# Altium PCB stc15.PcbDoc
Units mil, origin at the board's own origin, x right, y up, seen from the top; angles counter-clockwise.
Board outline 820 x 900 mil, 2 copper layers (Top Layer, Bottom Layer); 10 components, 12 nets, 53 pads, 6 vias.
Unrouted connection lines stored in the file: 1.
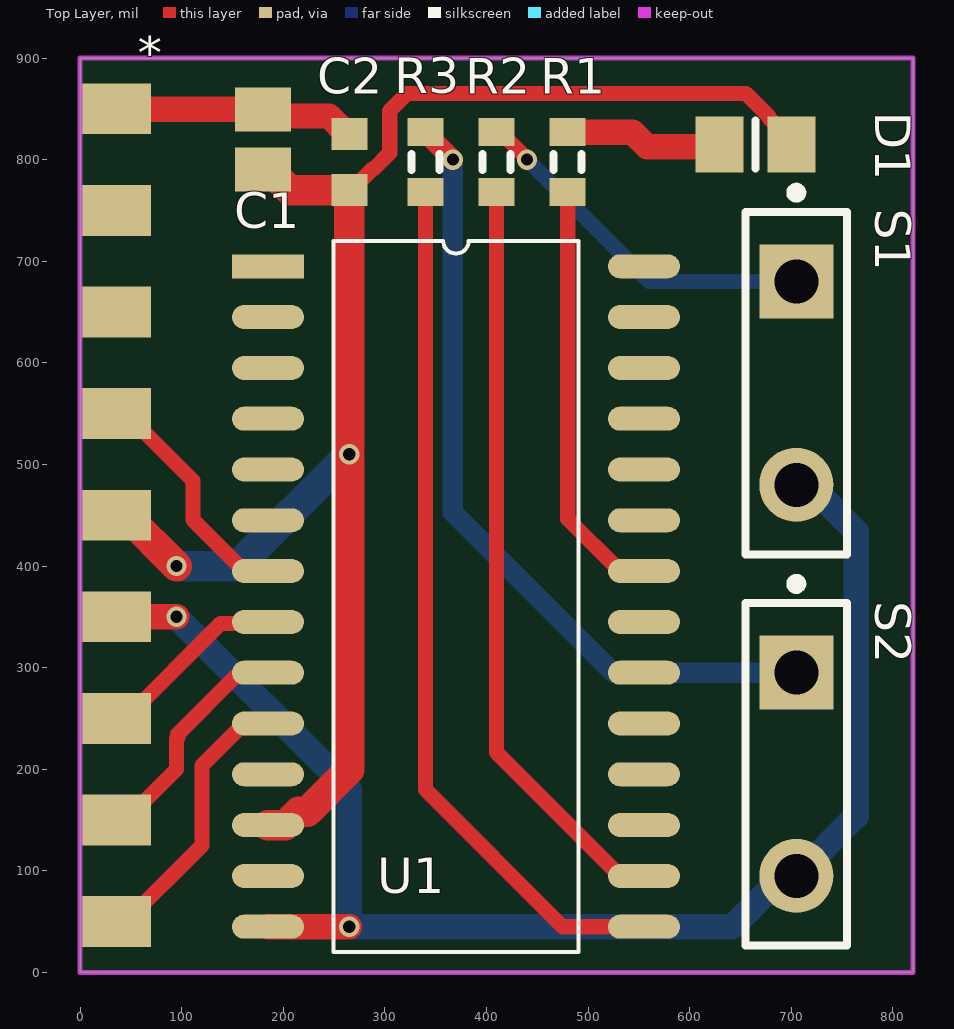
[diagram p0: Top Layer view]
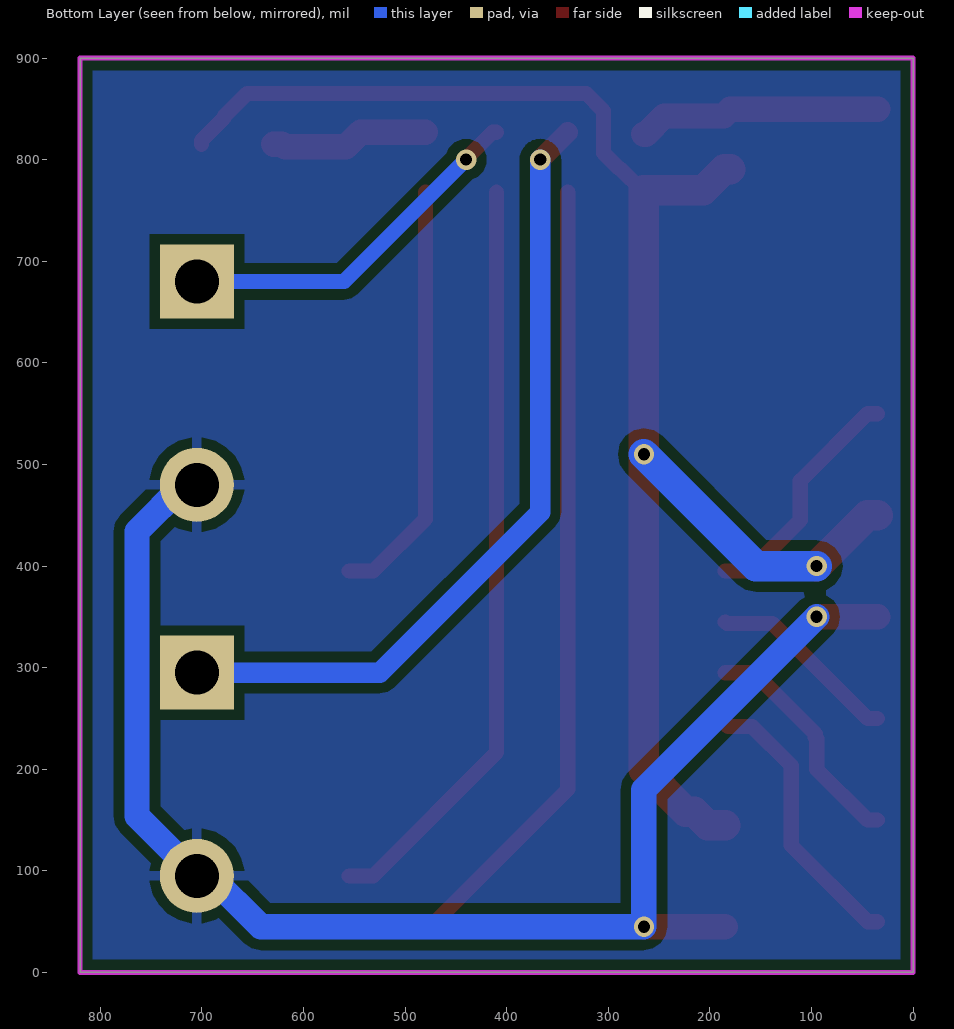
[diagram p1: Bottom Layer view, seen from below]

## Layer stack, top to bottom
Top Solder: solder mask 0.4, Solder Resist, Dk 3.5
Top Layer: signal copper 1.4
Dielectric 1: dielectric 12.6, FR-4, Dk 4.8
Bottom Layer: signal copper 1.4
Bottom Solder: solder mask 0.4, Solder Resist, Dk 3.5

## Board outline
0,0 0,900 820,900 820,0

## Design rules (kind name [scope] priority, off if disabled: settings)
Clearance "Stitching GND" [IsStitchingVia and InNet('GND') vs (IsVia and (Not IsStitchingVia)) Or IsPad] p1: gap=5 ignorepadtopadclearanceinfootprint=FALSE
Clearance [All] p2: gap=10 ignorepadtopadclearanceinfootprint=FALSE except(0: Arc-Hole Track-Hole SMDPad-Hole THPad-Hole Via-Hole Fill-Hole Poly-Hole Region-Hole Text-Hole)
PolygonConnect [All] p1: connectstyle=Relief reliefconductorwidth=10 reliefentries=4 polygonreliefangle="90 Angle" airgapwidth=10
RoutingVias [All] p1: holewidth=20 width=25 viastyle="Through Hole" minholewidth=10 minwidth=5 maxholewidth=25 maxwidth=30
SolderMaskExpansion [All] p1: expansion=4 istentingtop=FALSE
Width [All] p1: maxlimit=30 minlimit=15 preferedwidth=25 minimp=50.000000 maximp=50.000000 favimp=50.000000
Width Width_GND [InNet('GND')] p2: maxlimit=30 minlimit=20 preferedwidth=30 minimp=50.000000 maximp=50.000000 favimp=50.000000
30 further rules are at their usual default settings.

## Components (designator, comment, footprint, x,y, rotation, side; value= is the part's Value field where it differs from the comment)
* "9pads" 9pads 35,50 r180 top
C1 "Cap Pol3" C0805 180,820 r90 top value=100pF
C2 "Cap Semi" 1608[0603] 265,797.44 r270 top value=100pF
D1 "LED2" 6-0805_N 665,815 r180 top
R1 "Res3" J1-0603 480,797.44 r90 top value=1K
R2 "Res3" J1-0603 410,797.44 r90 top value=1K
R3 "Res3" J1-0603 340,797.44 r90 top value=1K
S1 "SW-PB" SPST-2 705,580 r270 top
S2 "SW-PB" SPST-2 705,195 r270 top
U1 "STC15W401AS_SOP28_TSSOP28_SKDIP28" SOP28 184.92,695 r0 top

## Footprints (in the part's own frame and the unit in brackets; to place one, negate y for a bottom-side part, rotate by r counter-clockwise, add the part's x,y. Pads: shape width x height; smd on the part's side, far side on the other; paste and mask are expansions set on the pad)
6-0805_N [mm] "Chip Resistor, Body 2.0x1.2mm, IPC Medium Density"
  rect 1.2x1.4 smd: 1(-0.9,0) 2(0.9,0)
  silkscreen extent 0,-0.6 0,0.6, body extent -1.07,-0.7 1.07,0.7, height 0.7
9pads [mil]
  rect 70x50 smd: 1(0,0) 2(0,-100) 3(0,-200) 4(0,-300) 5(0,-400) 6(0,-500) 7(0,-600) 8(0,-700) 9(0,-800)
1608[0603] [mm] "Chip Capacitor, Body 1.6x0.8mm, IPC High Density"
  rect 0.8x0.9 smd: 1(-0.7,0) 2(0.7,0)
  body extent -0.87,-0.48 0.87,0.48, height 1.3
C0805 [mm] "Chip Capacitor, Body 2.0x1.3mm, IPC High Density"
  rect 1.1x1.4 smd: 1(-0.75,0) 2(0.75,0)
  body extent -1.1,-0.72 1.1,0.72, height 1.4
J1-0603 [mm] "Chip Resistor, Body 1.6x0.8mm, IPC High Density"
  rect 0.7x0.9 smd: 1(-0.75,0) 2(0.75,0)
  silkscreen extent -0.2,-0.35 0.2,0.35, body extent -0.85,-0.48 0.85,0.48, height 0.9
SOP28 [mm]
  rect 1.8x0.6 smd: 1(0,0)
  oval 1.8x0.6 smd: 2(0,-1.27) 3(0,-2.54) 4(0,-3.81) 5(0,-5.08) 6(0,-6.35) 7(0,-7.62) 8(0,-8.89) 9(0,-10.16) 10(0,-11.43) 11(0,-12.7) 12(0,-13.97) 13(0,-15.24) 14(0,-16.51) 15(9.4,-16.51) 16(9.4,-15.24) 17(9.4,-13.97) 18(9.4,-12.7) 19(9.4,-11.43) 20(9.4,-10.16) 21(9.4,-8.89) 22(9.4,-7.62) 23(9.4,-6.35) 24(9.4,-5.08) 25(9.4,-3.81) 26(9.4,-2.54) 27(9.4,-1.27) 28(9.4,0)
  silkscreen extent 1.64,-17.14 7.77,0.64
SPST-2 [mm] "Switch; 2 Leads"
  rect 1.85x1.85 hole 1.1: 1(-2.54,0)
  round 1.85 hole 1.1: 2(2.54,0)
  silkscreen extent -4.89,-1.27 4.28,1.27

## Part data
C1: "Polarized Capacitor (Surface Mount)", LatestRevisionDate=29-May-2009, LatestRevisionNote="IPC-7351 Footprint Added.", PackageDescription="Chip Capacitor", PackageReference=C0805, Published=8-Jun-2000, Publisher="Altium Limited"
C2: "Capacitor (Semiconductor SIM Model)", LatestRevisionDate=29-May-2009, LatestRevisionNote="IPC-7351 Footprint Added.", PackageDescription="Chip Capacitor", PackageReference=C1206, Published=8-Jun-2000, Publisher="Altium Limited"
D1: "Typical RED, GREEN, YELLOW, AMBER GaAs LED", LatestRevisionDate=17-Jul-2002, LatestRevisionNote="Re-released for DXP Platform.", PackageDescription="SM LED; 2 Flat Leads", PackageReference=3.2X1.6X1.1, PackageVersion=Feb-2002, Published=8-Jun-2000, Publisher="Altium Limited"
R1 R2 R3: "Resistor", LatestRevisionDate=29-May-2009, LatestRevisionNote="IPC-7351 Footprint Added.", PackageDescription="Chip Resistor", PackageReference=J1-0603, Published=8-Jun-2000, Publisher="Altium Limited"
S1 S2: "Switch", LatestRevisionDate=17-Jul-2002, LatestRevisionNote="Re-released for DXP Platform.", PackageDescription="Switch; 2 Leads", PackageReference=SPST-2, Published=24-Mar-1999, Publisher="Altium Limited"

## Via types
v1: diameter 20, hole 12, Top Layer to Bottom Layer, 6 vias

## Nets (pads, with @x,y where several pads share a name; then routed paths per layer and width w, separated by ;. In a path a pad name is that pad's centre, name@x,y a point inside that pad or via, vN(x,y) a via of type N, cw(c..) or ccw(c..) an arc to the next point about the centre after c; other vN are vias at no path point)
CH1: *.1 U1.10 | length 276.8
  Top Layer w15: *.1 45,50 120,125 120,203.7 158.48,242.18 182.11,242.18 U1.10
CH2: *.2 U1.9 | length 229.6
  Top Layer w15: *.2 45,150 95,200 95,230 96.25,231.25 96.25,234.7 152.24,290.69 154.66,290.69 158.97,295 U1.9
CH3: *.3 U1.8 | length 189.3
  Top Layer w15: *.3 45,250 138.35,343.35 183.27,343.35 U1.8
GND: *.4 *.9 C1.2 C2.1 S1.2 S2.2 U1.14 | length 1657.9
  Top Layer w25: *.4 v1(95,350) ; *.9@35,849.76 179.76,849.76 C1.2 186.56,842.97 245.06,842.97 263.03,825 C2.1 ; U1.14 v1(265,45)
  Bottom Layer w25: v1(95,350) 265,180 v1(265,45) 642.06,45 692.06,95 S2.2 763.92,153.92 763.92,434.03 717.94,480 S1.2
NetD1_2: D1.2 R1.2 | length 156.6
  Top Layer w25: R1.2 543.96,826.97 558.42,812.5 618.44,812.5 620.94,815 D1.2
NetR1_1: R1.1 U1.22 | length 417.8
  Top Layer w15: R1.1 480,446.38 531.38,395 U1.22
NetR2_1: R2.1 U1.16 | length 746.8
  Top Layer w15: R2.1 410,216.38 531.38,95 U1.16
NetR2_2: R2.2 S1.1 | length 356.4
  Top Layer w15: R2.2 413.94,826.97 440,800.91 v1(440,800)
  Bottom Layer w15: v1(440,800) 560,680 S1.1
NetR3_1: R3.1 U1.15 | length 858.8
  Top Layer w15: R3.1 340,180 475,45 U1.15
NetR3_2: R3.2 S2.1 | length 788.6
  Top Layer w20: R3.2 v1(366.97,800)
  Bottom Layer w20: v1(366.97,800) 366.97,453.03 525,295 S2.1
RSSI: *.6 U1.7 | length 236.8
  Top Layer w15: *.6 45,550 111.08,483.92 111.08,445.22 161.3,395 U1.7
VCC: *.5 C1.1 C2.2 D1.1 U1.12 | length 1585.7
  Top Layer w15: C2.2 266.97,769.88 288.48,791.4 289.61,791.4 304.78,806.57 304.78,848 321.79,865 655.5,865 678.19,842.31 678.19,841.18 700.43,818.94 D1.1
  Top Layer w30: *.5 45,450 v1(95,400) ; C1.1 185.91,790.47 206.5,769.88 C2.2 v1(265,510) 265,199.4 223.79,158.19 215.36,158.19 202.17,145 U1.12
  Bottom Layer w30: v1(95,400) 155,400 v1(265,510)
pads on no net: *.7 *.8 U1.1 U1.2 U1.3 U1.4 U1.5 U1.6 U1.11 U1.13 U1.17 U1.18 U1.19 U1.20 U1.21 U1.23 U1.24 U1.25 U1.26 U1.27 U1.28

## Polygon pours and split planes (outlines as drawn)
GND on Bottom Layer "GND_L02_P000" (solid, remove dead copper, pour order 0): 0,900 0,0 820,0 820,900

## Keep-outs
Keep-Out Layer:
  the board outline again, w5